# Altium PCB PCB_LMH0397_Breakout_2024-11-17.pcbdoc
Units mil, origin at the board's own origin, x right, y up, seen from the top; angles counter-clockwise.
Board outline 5208.03 x 3805 mil, 2 copper layers (Top Layer, Bottom Layer); 113 components, 59 nets, 262 pads, 77 vias.
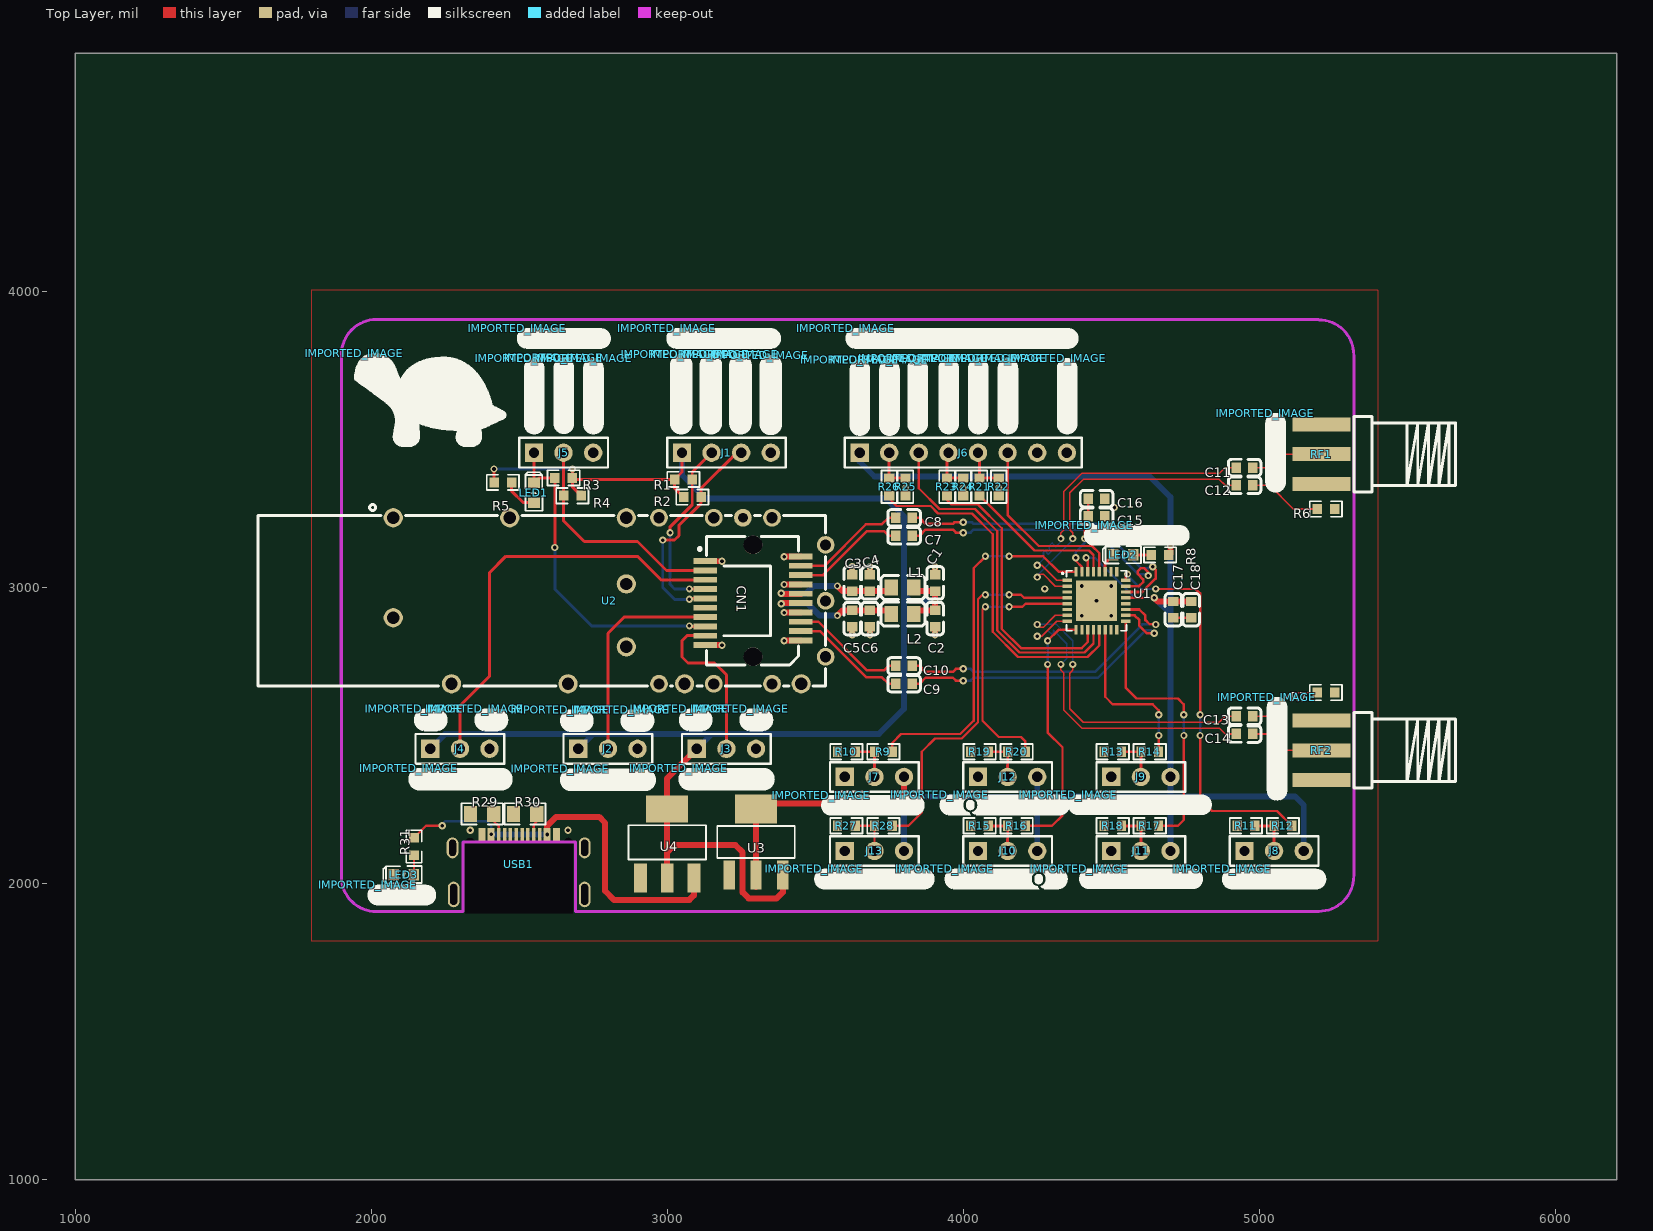
[diagram p0: Top Layer view]
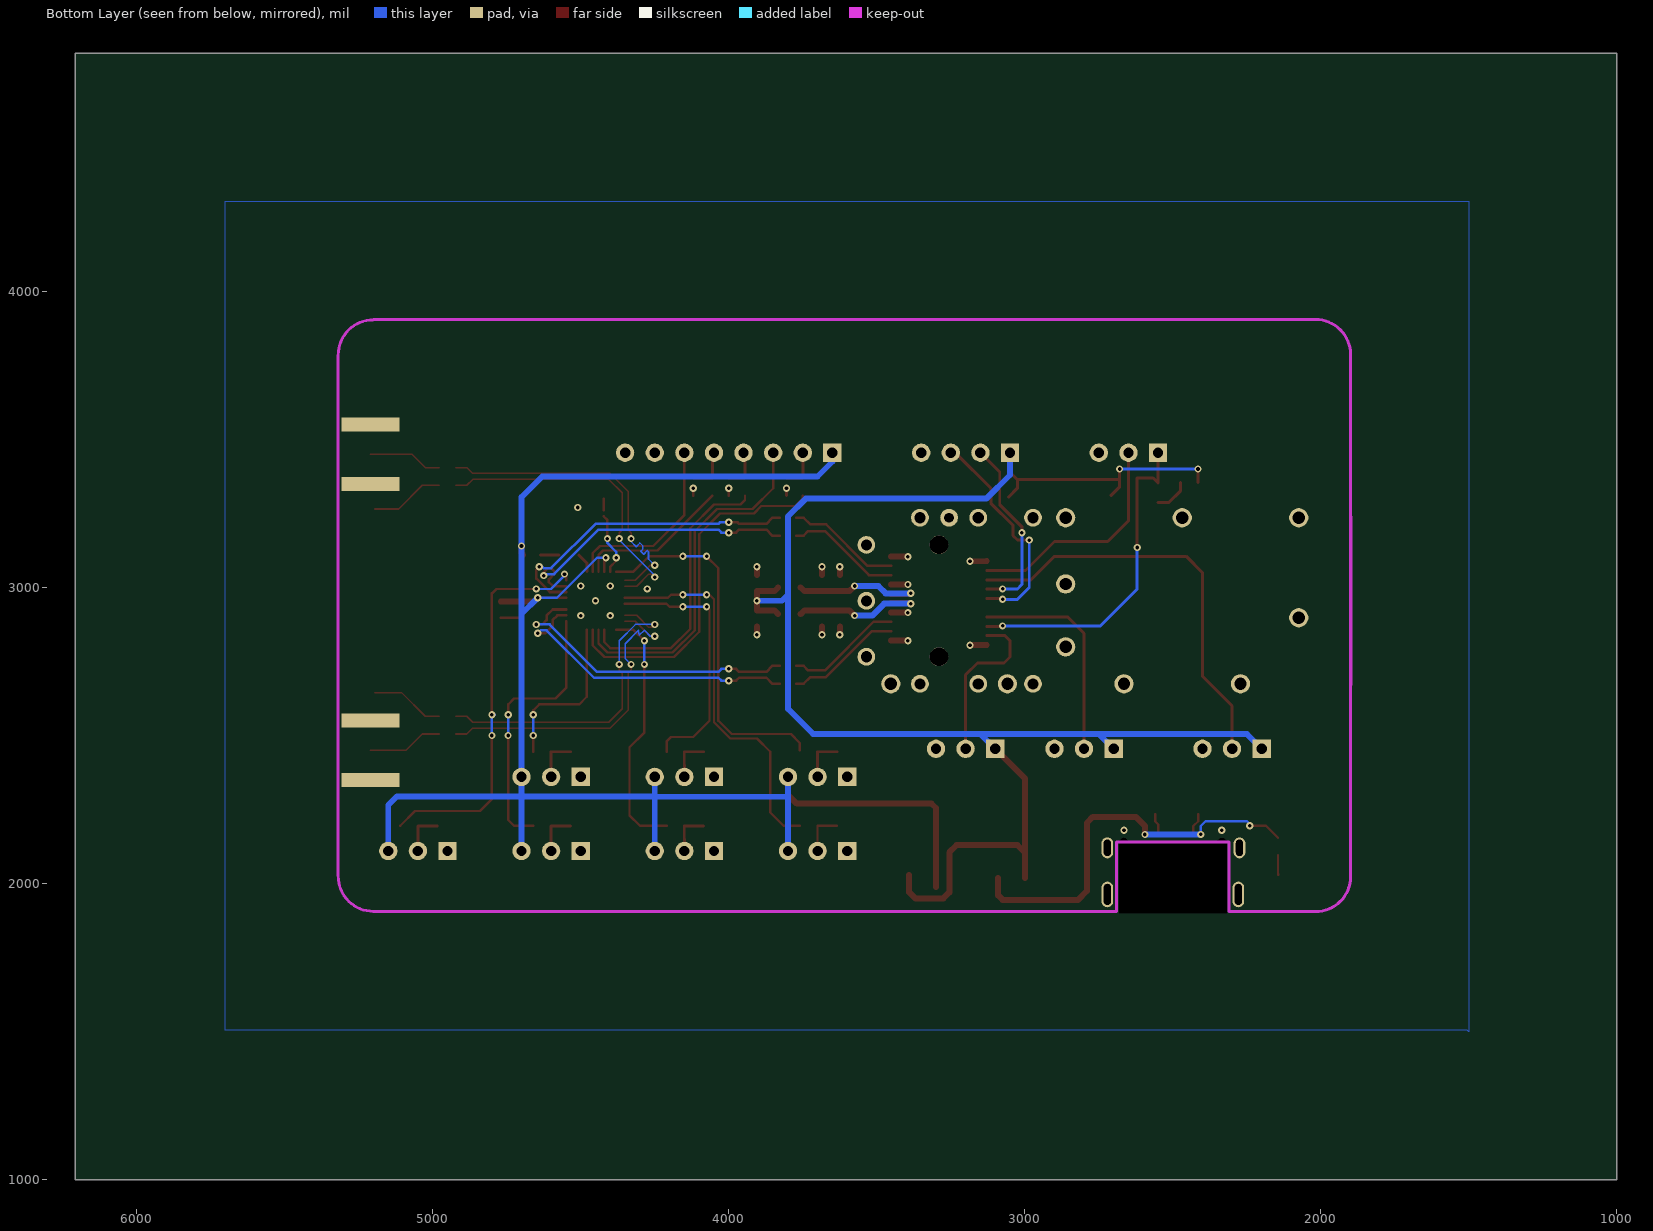
[diagram p1: Bottom Layer view, seen from below]

## Layer stack, top to bottom
Top Layer: signal copper (thickness not stored)
Dielectric: dielectric 12.6, FR-4, Dk 4.8
Bottom Layer: signal copper (thickness not stored)

## Board outline
6208.03,1000 1000,1000 1000,4805 6208.03,4805

## Components (designator, comment, footprint, x,y, rotation, side; value= is the part's Value field where it differs from the comment)
C1 "10u" C0603 3905,3015 r270 top
C2 "100n" C0603 3905,2895 r90 top
C3 "100n" C0603 3625,3015 r270 top
C4 "10u" C0603 3685,3015 r270 top
C5 "100n" C0603 3625,2895 r90 top
C6 "10u" C0603 3685,2895 r90 top
C7 "4.7uF" C0603 3800,3175 r180 top
C8 "4.7uF" C0603 3800,3235 r180 top
C9 "4.7uF" C0603 3800,2675 r180 top
C10 "4.7uF" C0603 3800,2735 r180 top
C11 "4.7uF" C0603 4950,3405 r180 top
C12 "4.7uF" C0603 4950,3345 r180 top
C13 "4.7uF" C0603 4950,2565 r180 top
C14 "4.7uF" C0603 4950,2505 r180 top
C15 "1u" C0603 4450,3240 r180 top
C16 "100n" C0603 4450,3300 r180 top
C17 "100n" C0603 4710,2925 r90 top
C18 "1u" C0603 4770,2925 r90 top
CN1 "HC-SFP-20P" CONN-SMD_20P-P0.80_HCTL_HC-SFP-20P 3290,2955 r270 top
IMPORTED_IMAGE "IMPORTED_IMAGE" IMPORTED_IMAGE 2638.63,2387.52 r0 top
IMPORTED_IMAGE "IMPORTED_IMAGE" IMPORTED_IMAGE 3038.73,2390 r0 top
IMPORTED_IMAGE "IMPORTED_IMAGE" IMPORTED_IMAGE 2126.43,2390 r0 top
IMPORTED_IMAGE "IMPORTED_IMAGE" IMPORTED_IMAGE 3040.25,2590 r0 top
IMPORTED_IMAGE "IMPORTED_IMAGE" IMPORTED_IMAGE 2638.87,2587.52 r0 top
IMPORTED_IMAGE "IMPORTED_IMAGE" IMPORTED_IMAGE 2145.25,2590 r0 top
IMPORTED_IMAGE "IMPORTED_IMAGE" IMPORTED_IMAGE 3244.43,2590 r0 top
IMPORTED_IMAGE "IMPORTED_IMAGE" IMPORTED_IMAGE 2349.43,2590 r0 top
IMPORTED_IMAGE "IMPORTED_IMAGE" IMPORTED_IMAGE 2843.05,2587.52 r0 top
IMPORTED_IMAGE "IMPORTED_IMAGE" IMPORTED_IMAGE 3312.48,3785.04 r0 top
IMPORTED_IMAGE "IMPORTED_IMAGE" IMPORTED_IMAGE 3010,3787.52 r0 top
IMPORTED_IMAGE "IMPORTED_IMAGE" IMPORTED_IMAGE 3110,3787.52 r0 top
IMPORTED_IMAGE "IMPORTED_IMAGE" IMPORTED_IMAGE 3210,3787.52 r0 top
IMPORTED_IMAGE "IMPORTED_IMAGE" IMPORTED_IMAGE 2616.84,3775.29 r0 top
IMPORTED_IMAGE "IMPORTED_IMAGE" IMPORTED_IMAGE 2516.84,3774.08 r0 top
IMPORTED_IMAGE "IMPORTED_IMAGE" IMPORTED_IMAGE 2716.84,3774.08 r0 top
IMPORTED_IMAGE "IMPORTED_IMAGE" IMPORTED_IMAGE 3520.6,2298.16 r0 top
IMPORTED_IMAGE "IMPORTED_IMAGE" IMPORTED_IMAGE 3937.72,2049.08 r0 top
IMPORTED_IMAGE "IMPORTED_IMAGE" IMPORTED_IMAGE 4392.12,2050 r0 top
IMPORTED_IMAGE "IMPORTED_IMAGE" IMPORTED_IMAGE 4874.49,2049.08 r0 top
IMPORTED_IMAGE "IMPORTED_IMAGE" IMPORTED_IMAGE 4355.06,2300 r0 top
IMPORTED_IMAGE "IMPORTED_IMAGE" IMPORTED_IMAGE 3920.68,2299.08 r0 top
IMPORTED_IMAGE "IMPORTED_IMAGE" IMPORTED_IMAGE 3616.84,3769.08 r0 top
IMPORTED_IMAGE "IMPORTED_IMAGE" IMPORTED_IMAGE 3716.84,3769.08 r0 top
IMPORTED_IMAGE "IMPORTED_IMAGE" IMPORTED_IMAGE 3811.84,3774.08 r0 top
IMPORTED_IMAGE "IMPORTED_IMAGE" IMPORTED_IMAGE 3916.84,3774.08 r0 top
IMPORTED_IMAGE "IMPORTED_IMAGE" IMPORTED_IMAGE 4016.84,3774.08 r0 top
IMPORTED_IMAGE "IMPORTED_IMAGE" IMPORTED_IMAGE 4316.84,3774.08 r0 top
IMPORTED_IMAGE "IMPORTED_IMAGE" IMPORTED_IMAGE 4116.84,3774.08 r0 top
IMPORTED_IMAGE "IMPORTED_IMAGE" IMPORTED_IMAGE 3497.29,2049.08 r0 top
IMPORTED_IMAGE "IMPORTED_IMAGE" IMPORTED_IMAGE 1988.46,1995 r0 top
IMPORTED_IMAGE "IMPORTED_IMAGE" IMPORTED_IMAGE 4407.99,3210 r0 top
IMPORTED_IMAGE "IMPORTED_IMAGE" IMPORTED_IMAGE 5020.92,3588.78 r0 top
IMPORTED_IMAGE "IMPORTED_IMAGE" IMPORTED_IMAGE 5025.92,2629.64 r0 top
IMPORTED_IMAGE "IMPORTED_IMAGE" IMPORTED_IMAGE 2997.76,3875 r0 top
IMPORTED_IMAGE "IMPORTED_IMAGE" IMPORTED_IMAGE 3602.76,3875 r0 top
IMPORTED_IMAGE "IMPORTED_IMAGE" IMPORTED_IMAGE 2492.76,3875 r0 top
IMPORTED_IMAGE "IMPORTED_IMAGE" IMPORTED_IMAGE 1942.7,3790.77 r0 top
J1 "SFP_I2C" HDR-M-2.54_1X4 3200,3455 r0 top
J2 "SFP_RATE0" HDR-M-2.54_1X3 2800,2455 r0 top
J3 "SFP_RATE1" HDR-M-2.54_1X3 3200,2455 r0 top
J4 "TX_DISABLE" HDR-M-2.54_1X3 2300,2455 r0 top
J5 "LOS_FAULT" HDR-M-2.54_1X3 2650,3455 r0 top
J6 "DRIVER_SPI" HDR-M-2.54_1X8 4050,3455 r0 top
J7 "DRIVER_EN" HDR-M-2.54_1X3 3700,2360 r0 top
J8 "SDI_VDO" HDR-M-2.54_1X3 5050,2110 r0 top
J9 "SDI_OUTSEL" HDR-M-2.54_1X3 4600,2360 r0 top
J10 "HOST_EQ0" HDR-M-2.54_1X3 4150,2110 r0 top
J11 "OUT_CTRL" HDR-M-2.54_1X3 4600,2110 r0 top
J12 "EQCD_SEL" HDR-M-2.54_1X3 4150,2360 r0 top
J13 "OUT0_SEL" HDR-M-2.54_1X3 3700,2110 r0 top
L1 "100Ω" L0805 3795,3000 r180 top
L2 "100Ω" L0805 3795,2910 r180 top
LED1 "LED_LOS" LED0603_RED 2550,3320 r90 top
LED2 "LOCKED" LED0603_GREEN 4540,3110 r180 top
LED3 "LED_POW" LED0603_RED 2110,2030 r180 top
R1 "4.7k" R0603 3055,3365 r0 top
R2 "4.7k" R0603 3085,3305 r0 top
R3 "4.7k" R0603 2650,3370 r180 top
R4 "4.7k" R0603 2680,3310 r180 top
R5 "1k" R0603 2445,3355 r0 top
R6 "75" R0603 5225,3265 r180 top
R7 "75" R0603 5225,2645 r180 top
R8 "200" R0603 4665,3110 r0 top
R9 "1k" R0603 3730,2445 r180 top
R10 "1k" R0603 3605,2445 r180 top
R11 "1k" R0603 4955,2195 r180 top
R12 "1k" R0603 5080,2195 r180 top
R13 "1k" R0603 4505,2445 r180 top
R14 "1k" R0603 4630,2445 r180 top
R15 "1k" R0603 4055,2195 r180 top
R16 "1k" R0603 4180,2195 r180 top
R17 "1k" R0603 4630,2195 r180 top
R18 "1k" R0603 4505,2195 r180 top
R19 "1k" R0603 4055,2445 r180 top
R20 "1k" R0603 4180,2445 r180 top
R21 "1k" R0603 4055,3340 r90 top
R22 "1k" R0603 4120,3340 r270 top
R23 "1k" R0603 3945,3340 r90 top
R24 "1k" R0603 4000,3340 r270 top
R25 "1k" R0603 3805,3340 r270 top
R26 "1k" R0603 3750,3340 r90 top
R27 "1k" R0603 3605,2195 r180 top
R28 "1k" R0603 3730,2195 r180 top
R29 "1k" R0805 2375,2235 r0 top
R30 "1k" R0805 2520,2235 r0 top
R31 "1k" R0603 2145,2125 r270 top
RF1 "SDI_IN" SMA-SMD_BWSMA-KE-P001 5210,3450 r180 top
RF2 "SDI_OUT" SMA-SMD_BWSMA-KE-P001 5210,2450 r180 top
U1 "LMH0397RTVR" QFN-32_L5.0-W5.0-P0.50-TL-EP3.5-1 4450,2955 r0 top
U2 "HC-SFP-01L" TH_HC-SFP-01L 2805,2955 r0 top
U3 "AMS1117-2.5(SOT-223)" SOT-223-4_L6.5-W3.5-P2.30-LS7.0-BR 3300,2140 r270 top
U4 "AMS1117-3.3" SOT-223-3_L6.5-W3.4-P2.30-LS7.0-BR 3000,2135 r270 top
USB1 "USB4510-03-1-A" USB4510-03-1-A 2500,1900 r180 top

## Footprints (in the part's own frame and the unit in brackets; to place one, negate y for a bottom-side part, rotate by r counter-clockwise, add the part's x,y. Pads: shape width x height; smd on the part's side, far side on the other; paste and mask are expansions set on the pad)
C0603 [mm]
  rect 0.8x0.9 smd paste+0 mask+0.051: 1(-0.7,0) 2(0.7,0)
  silkscreen extent -1.41,-0.71 1.39,0.72
CONN-SMD_20P-P0.80_HCTL_HC-SFP-20P [mm]
  rect 0.5x2 smd paste+0 mask+0.051: 1(-3.4,-4.1) 2(-2.6,-4.1) 3(-1.8,-4.1) 4(-1,-4.1) 5(-0.2,-4.1) 6(0.6,-4.1) 7(1.4,-4.1) 8(2.2,-4.1) 9(3,-4.1) 10(3.8,-4.1) 11(3.4,4.1) 12(2.6,4.1) 13(1.8,4.1) 14(1,4.1) 15(0.2,4.1) 16(-0.6,4.1) 17(-1.4,4.1) 18(-2.2,4.1) 19(-3,4.1) 20(-3.8,4.1)
  round 1.6 hole 1.6 unplated paste+0: ""(-4.8,0) ""(4.8,0)
  silkscreen extent -5.5,-4.7 5.5,3.9
HDR-M-2.54_1X3 [mil]
  rect 62x62 hole 35 paste+0 mask+2: 1(-100,0)
  round 62 hole 35 paste+0 mask+2: 2(0,0) 3(100,0)
  silkscreen extent -150,-50 150,50
HDR-M-2.54_1X4 [mil]
  rect 62x62 hole 35 paste+0 mask+2: 1(-150,0)
  round 62 hole 35 paste+0 mask+2: 2(-50,0) 3(50,0) 4(150,0)
  silkscreen extent -200,-50 200,50
HDR-M-2.54_1X8 [mil]
  rect 62x62 hole 35 paste+0 mask+2: 1(-400,0)
  round 62 hole 35 paste+0 mask+2: 2(-300,0) 3(-200,0) 4(-100,0) 5(0,0) 6(100,0) 7(200,0) 8(300,0)
  silkscreen extent -450,-50 350,50
IMPORTED_IMAGE [mil]
  silkscreen extent 0,-75 323,0
L0805 [mil]
  rect 44.59x54.21 smd paste-3937.01 mask+2: 1(-38.05,0) 2(38.04,0)
  silkscreen extent -77,-40 73,40
LED0603_GREEN [mm]
  rect 0.9x1 smd paste+0 mask+0.051: 1(-0.85,0) 2(0.85,0)
  silkscreen extent -1.54,-0.73 1.75,0.73
LED0603_RED [mm]
  rect 0.9x1 smd paste+0 mask+0.051: 1(-0.85,0) 2(0.85,0)
  silkscreen extent -1.54,-0.73 1.75,0.73
QFN-32_L5.0-W5.0-P0.50-TL-EP3.5-1 [mm]
  rect 0.8x0.28 smd paste-100 mask+0.051: 1(-2.5,1.75) 2(-2.5,1.25) 3(-2.5,0.75) 4(-2.5,0.25) 5(-2.5,-0.25) 6(-2.5,-0.75) 7(-2.5,-1.25) 8(-2.5,-1.75) 17(2.5,-1.75) 18(2.5,-1.25) 19(2.5,-0.75) 20(2.5,-0.25) 21(2.5,0.25) 22(2.5,0.75) 23(2.5,1.25) 24(2.5,1.75)
  rect 0.28x0.8 smd paste-100 mask+0.051: 9(-1.75,-2.5) 10(-1.25,-2.5) 11(-0.75,-2.5) 12(-0.25,-2.5) 13(0.25,-2.5) 14(0.75,-2.5) 15(1.25,-2.5) 16(1.75,-2.5) 25(1.75,2.5) 26(1.25,2.5) 27(0.75,2.5) 28(0.25,2.5) 29(-0.25,2.5) 30(-0.75,2.5) 31(-1.25,2.5) 32(-1.75,2.5)
  rect 3.5x3.5 smd paste-100 mask+0.051: 33(0,0)
  silkscreen extent -2.98,-2.58 2.58,2.58
R0603 [mil]
  rect 31.75x34.02 smd paste-3937.01 mask+2: 1(-29.66,0) 2(29.66,0)
  silkscreen extent -55,-26 55,26
R0805 [mil]
  rect 44.59x54.21 smd paste-3937.01 mask+2: 1(-39.37,0) 2(39.37,0)
  silkscreen extent -69,-36 69,36
SMA-SMD_BWSMA-KE-P001 [mm]
  rect 5x1.2 smd paste+0 mask+0.051: 1(0,2.55) 2(0,-2.55) 5(0,0)
  rect 5x1.2 smd far side paste+0 mask+0.051: 3(0,-2.55) 4(0,2.55)
  silkscreen extent -11.5,-3.25 -2.79,3.25
SOT-223-3_L6.5-W3.4-P2.30-LS7.0-BR [mm]
  rect 2.5x1.1 smd paste+0 mask+0.051: 1(2.97,-2.3) 2(2.97,0) 3(2.97,2.3)
  rect 2.34x3.6 smd paste+0 mask+0.051: 4(-2.97,0)
  silkscreen extent -1.57,-3.33 1.37,3.33
SOT-223-4_L6.5-W3.5-P2.30-LS7.0-BR [mm]
  rect 2.47x0.98 smd paste+0 mask+0.051: 1(2.835,-2.3) 2(2.835,0) 3(2.835,2.3)
  rect 2.47x3.6 smd paste+0 mask+0.051: 4(-2.835,0)
  silkscreen extent -1.37,-3.33 1.37,3.33
TH_HC-SFP-01L [mm]
  round 1.65 hole 1.05 paste+0 mask+0.05: 1(-18.55,7.125) 2(-8.55,7.125) 3(1.45,7.125) 11(16.45,-7.125) 14(6.45,-7.125) 16(-3.55,-7.125) 17(-13.55,-7.125) 18(-18.55,-1.455) 19(1.45,-3.955) 20(1.45,1.445)
  round 1.524 hole 0.95 paste+0 mask+0.05: 4(4.25,7.125) 5(8.95,7.125) 7(13.95,7.125) 8(18.55,4.795) 9(18.55,-0.005) 10(18.55,-4.805) 12(13.95,-7.125) 13(8.95,-7.125) 15(4.25,-7.125)
  round 1.524 hole 0.85 paste+0 mask+0.05: 6(11.45,7.125)
  Keep-Out Layer lines w0.254: -23.05,-7.239 -23.05,7.239
  silkscreen extent -30.15,-7.3 18.55,8.25
USB4510-03-1-A [mm]
  oval 1x2.2 hole 0.6 slot 1.8 at 90 deg unplated paste+0 mask+0.051: 1(-5.62,-1.6) 1(5.62,-1.6)
  oval 1x1.8 hole 0.6 slot 1.4 at 90 deg unplated paste+0 mask+0.051: 1(-5.62,-5.6) 1(5.715,-5.6)
  rect 0.6x1.1 smd paste+0: 2(-3.2,-6.75) 2(3.2,-6.75) 3(-2.4,-6.75) 3(2.4,-6.75)
  rect 0.3x1.1 smd paste+0: 4(-0.25,-6.75) 4(0.75,-6.75) 5(-0.75,-6.75) 5(0.25,-6.75) 6(-1.25,-6.75) 7(1.75,-6.75) 8(1.25,-6.75) 9(-1.75,-6.75)
  Multi-Layer board cut-out: 4.62,0 4.62,-6.048 4.58,-6.222 4.469,-6.361 4.309,-6.438 4.131,-6.438 3.971,-6.361 3.86,-6.222 3.82,-6.048 3.82,-6.048 3.82,-6.048 -3.82,-6.048 -3.82,-6.048 -3.86,-6.222 -3.971,-6.361 -4.131,-6.438 -4.309,-6.438 -4.469,-6.361 -4.58,-6.222 -4.62,-6.048 -4.62,-6.048 -4.62,0

## Via types
v1: diameter 24.41, hole 12.2, Top Layer to Bottom Layer, tented both sides, 77 vias

## Nets (pads, with @x,y where several pads share a name; then routed paths per layer and width w, separated by ;. In a path a pad name is that pad's centre, name@x,y a point inside that pad or via, vN(x,y) a via of type N, cw(c..) or ccw(c..) an arc to the next point about the centre after c; other vN are vias at no path point)
+1.8V: C15.2 C16.2 U1.31 | length 252.8
  Top Layer w7.87: v1(4380,3100) 4380,3090 4400.8,3069.2 U1.31 ; v1(4410,3165) 4410,3227.56 C15.2 ; 4422.44,3260 C16.2
  Bottom Layer w7.87: v1(4380,3100) 4380,3120 4410,3150 v1(4410,3165)
+2.5V: C17.2 C18.2 J6.1 J7.3 J8.3 J9.3 J10.3 J11.3 J12.3 J13.3 R8.2 U1.21 U1.30 U3.2 U3.4 | length 5991.5
  Top Layer w7.87: v1(4415,3100) 4420.47,3094.53 U1.30 ; U1.21 4548.6,2965 v1(4645,2965)
  Top Layer w19.68: v1(4645,2965) 4657.4,2952.6 C17.2 ; C17.2 C18.2
  Top Layer w20.16: U3.2@3300,1988.39 U3.4 3300,2255 3315,2270 3770,2270 3800,2300 J7.3 ; R8.2 4700,3115.34 v1(4700,3140)
  Bottom Layer w7.87: v1(4415,3100) 4445,3100 4580,2965 v1(4645,2965)
  Bottom Layer w19.68: J6.1 3650,3425 3700,3375 4630,3375 4700,3305 4700,2910 ; J13.3 J7.3 3800,2293 4250,2293 ; J10.3 J12.3 4250,2294 4700,2294 5121,2294 5150,2265 J8.3 ; v1(4645,2965) 4700,2910 ; J11.3 J9.3 4700,2910
+3.3V: C1.2 C2.2 J1.1 J2.1 J3.1 J4.1 L1.1 L2.1 R1.1 R2.1 R3.1 R4.1 R5.1 U3.3 U4.2 U4.4 | length 5782.1
  Top Layer w10: v1(2415,3400) 2415,3355.34 R5.1 ; v1(2680,3400) 2680,3370.34 R3.1 ; R4.1 2679.66,3340 R3.1 ; J1.1 3050,3389.66 R1.1 ; R2.1 3025.34,3335 R1.1 ; R3.1 2684.66,3365 R1.1
  Top Layer w20.16: J3.1 3000,2355 U4.4 U4.2 3000,2105 3025,2130 3230,2130 3255,2105 3255,1970 3275,1950 3370,1950 3390.6,1970.5 U3.3 ; L2.1 3845.6,2922.56 C2.2 C1.2 3845.6,2987.44 L1.1
  Bottom Layer w10: v1(2415,3400) v1(2680,3400)
  Bottom Layer w20.16: J4.1 2250,2505 2750,2505 ; J2.1 2750,2505 ; J1.1 3050,3380 3130,3300 3740,3300 3800,3240 3800,2975 ; J3.1 3150,2505 ; v1(3905,2955) 3820,2955 3800,2975 ; 2750,2505 3150,2505 ; 3150,2505 3715,2505 3800,2590 3800,2975
+5V: R31.1 U4.3 USB1.3 | length 1362.5
  Top Layer w7.87: R31.1 2185.34,2195 v1(2240,2195)
  Top Layer w20.16: v1(2594.5,2165.7) 2594.5,2194.5 2625,2225 2770,2225 2790,2205 2790,1975 2820,1945 3075,1945 3090,1960 U4.3
  Bottom Layer w7.87: v1(2240,2195) 2240,2200 2250,2210 2390,2210 2405.51,2194.49 v1(2405.51,2165.75)
  Bottom Layer w20.16: v1(2405.51,2165.75) v1@2594.49,2165.75
DRIVER_EN: R9.1 U1.32 | length 1230.1
  Top Layer w7.87: R9.1@3760,2450 3759.9,2474.8 3790.1,2505 3990,2505 4035,2550 4035,3065 v1(4075,3105) ; v1(4155,3105) 4270,3105 4321.6,3053.4 U1.32
  Bottom Layer w7.87: v1(4075,3105) v1(4155,3105)
DRIVER_EQCD_SEL: R20.1 U1.5 | length 878.9
  Top Layer w7.87: v1(4075,2935) 4065,2925 4065,2550 4120,2495 4195,2495 4210,2480 R20.1 ; v1(4155,2935) 4200,2935 4210.16,2945.16 U1.5
  Bottom Layer w7.87: v1(4075,2935) v1(4155,2935)
DRIVER_HOST_EQ0: R16.1 U1.9 | length 861.8
  Top Layer w7.87: R16.1 4300,2195 4335,2230 4335,2460 4285,2510 v1(4285,2740) ; v1(4285,2820) 4321.58,2856.58 U1.9
  Bottom Layer w7.87: v1(4285,2740) v1(4285,2820)
DRIVER_MISO: J6.6 U1.28 | length 635.4
  Top Layer w7.87: J6.6 4150,3245 4255,3140 4435,3140 4459.8,3115.2 U1.28
DRIVER_MODE: J6.3 U1.12 | length 1195.2
  Top Layer w7.87: J6.3 3850,3335 3920,3265 4040,3265 4115,3190 4115,2855 4190,2780 4410,2780 4440.2,2810.2 U1.12
DRIVER_MOSI: R26.1 U1.13 | length 1203.3
  Top Layer w7.87: R26.1 3750,3300 3775,3275 3890,3275 3915,3250 4030,3250 4100,3180 4100,2850 4185,2765 4420,2765 4459.8,2804.8 U1.13
DRIVER_MOSI_25V: J6.2 R25.1 R26.2 | length 140.3
  Top Layer w10: J6.2 R26.2 R25.1
DRIVER_OUT0_SEL: R28.1 U1.4 | length 1282.4
  Top Layer w7.87: R28.1 3815,2195 3860,2240 3860,2445 3905,2490 3995,2490 4050,2545 4050,2960 4065,2975 v1(4075,2975) ; v1(4155,2975) 4195,2975 4205.16,2964.84 U1.4
  Bottom Layer w7.87: v1(4075,2975) v1(4155,2975)
DRIVER_OUT_CTRL: R17.1 U1.17 | length 928.5
  Top Layer w7.87: U1.17 4548.4,2661.6 4585,2625 4725,2625 4745,2605 v1(4745,2570) ; R17.1 4725,2195 4745.34,2215.34 v1(4745.34,2500)
  Bottom Layer w7.87: v1(4745,2570) 4745.34,2569.66 v1(4745.34,2500)
DRIVER_SCK: R21.1 U1.29 | length 524.6
  Top Layer w7.87: R21.1 4240.3,3125 4425,3125 4440.2,3109.8 U1.29
DRIVER_SCK_25V: J6.5 R21.2 R22.1 | length 152.4
  Top Layer w10: J6.5 4055,3450 R21.2 R22.1
DRIVER_SDI_OUTSEL: R14.1 U1.14 | length 565.6
  Top Layer w7.87: U1.14 4479.5,2630.5 4505,2605 4640,2605 4660,2585 v1(4660,2570) ; R14.1 4660,2445.34 v1(4660,2500)
  Bottom Layer w7.87: v1(4660,2500) v1(4660,2570)
DRIVER_SDI_VDO: R12.1 U1.24 | length 1344.8
  Top Layer w7.87: U1.24 4548.43,3038.43 v1(4555,3045) ; v1(4650,2995) 4785,2995 4800,2980 v1(4800,2570) ; v1(4800,2500) 4800,2285 4840,2245 5059.66,2245 R12.1
  Bottom Layer w7.87: v1(4555,3045) 4555,3040 4600,2995 v1(4650,2995) ; v1@4790,2570 4800,2560 v1(4800,2500)
DRIVER_SS: R23.1 U1.11 | length 946.7
  Top Layer w7.87: R23.1 3945,3295 3960,3280 4050,3280 4130,3200 4130,2860 4195,2795 4400,2795 4420.5,2815.5 U1.11
DRIVER_SS_25V: J6.4 R23.2 R24.1 | length 142.4
  Top Layer w10: J6.4 3945,3450 R23.2 R24.1
GND: C1.1 C2.1 C3.1 C4.1 C5.1 C6.1 C15.1 C16.1 C17.1 C18.1 CN1.1 CN1.10 CN1.11 CN1.14 CN1.17 CN1.20 J1.4 J2.3 J3.3 J4.3 J5.3 J6.8 J7.1 J8.1 J9.1 J10.1 J11.1 J12.1 J13.1 LED3.2 R6.1 R7.1 R10.2 R11.2 R13.2 R15.2 R18.2 R19.2 R22.2 R24.2 R25.2 R27.2 R29.1 R30.1 RF1.1 RF1.2 RF1.3 RF1.4 RF2.1 RF2.2 RF2.3 RF2.4 U1.3 U1.6 U1.20 U1.33 U2.1 U2.2 U2.3 U2.4 U2.5 U2.6 U2.7 U2.8 U2.9 U2.10 U2.11 U2.12 U2.13 U2.14 U2.15 U2.16 U2.17 U2.18 U2.19 U2.20 U3.1 U4.1 USB1.1 USB1.2 | length 638.2
  Top Layer w7.87: C17.1 C18.1
  Top Layer w10: R25.2 v1(3805,3335) ; R24.2 v1(4000,3335) ; R22.2 v1(4120,3335)
  Top Layer w20.16: CN1.10 3184.61,2805.39 v1(3185,2805) ; CN1.1 v1(3185,3088.47) ; v1(3395,2820) 3396.14,2821.14 CN1.11 ; v1(3395,2915) CN1.14 ; v1(3395,3010) CN1.17 ; v1(3395,3103.47) 3396.14,3104.61 CN1.20 ; v1(3625,2840) C5.1 ; C3.1 v1(3625,3070) ; v1(3685,2840) C6.1 ; C4.1 v1(3685,3070) ; v1(3905,2840) C2.1 ; C1.1 v1(3905,3070)
  other v1: 2335,2180 2665,2180 4400,2905 4500,2905 4450,2955 4275,2995 4400,3005 4500,3005 4510,3270
J8_2: J8.2 R11.1 R12.2 | length 150.7
  Top Layer w10: R11.1 R12.2 J8.2@5050.34,2110
J9_2: J9.2 R13.1 R14.2 | length 150.7
  Top Layer w10: R13.1 R14.2 J9.2
J10_2: J10.2 R15.1 R16.2 | length 150.7
  Top Layer w10: R15.1 R16.2 J10.2
J11_2: J11.2 R17.2 R18.1 | length 150.7
  Top Layer w10: R18.1 R17.2 J11.2
J13_2: J13.2 R27.1 R28.2 | length 150.7
  Top Layer w7.87: R27.1 R28.2 ; J13.2 R28.2
LED1_1: LED1.1 R5.2 | length 121.1
  Top Layer w10: R5.2 2474.7,3325.3 2513.5,3286.5 LED1.1
LED2_1: LED2.1 R8.1 | length 61.9
  Top Layer w10: LED2.1 R8.1
R9_2: J7.2 R9.2 R10.1 | length 150.7
  Top Layer w10: R10.1 R9.2 J7.2
R20_2: J12.2 R19.1 R20.2 | length 150.7
  Top Layer w10: R19.1 R20.2 J12.2
R29_2: R29.2 USB1.7 | length 76.2
  Top Layer w7.87: R29.2 2414.4,2210.6 2431.1,2193.9 USB1.7@2431.1,2165.7
R30_2: R30.2 USB1.6 | length 73.5
  Top Layer w7.87: USB1.6@2549.2,2165.7 2549.2,2199.2 2559.4,2209.4 R30.2
R31_2: LED3.1 R31.2 | length 66
  Top Layer w7.87: LED3.1 2145,2031.53 R31.2
SDI_ID+: C11.2 U1.1 | length 1081.8
  Top Layer w5.31: v1(4250,3075) 4265,3075 4316.1,3023.9 U1.1 ; v1(4330,3165) 4330,3185 4340,3195 4340,3325 4400,3385 4865,3385 4885,3405 C11.2
  Bottom Layer w5.31: v1(4250,3075) 4271,3096 4271,3121 4275,3125 4287.5,3112.5 4297.5,3122.5 4290,3130 4290,3140 4300,3150 4312.5,3137.5 4330,3155 v1(4330,3165)
SDI_ID-: C12.2 U1.2 | length 1050.8
  Top Layer w5.31: v1(4250,3035) 4260,3045 4270,3045 4310.8,3004.2 U1.2 ; v1(4370,3165) 4370,3185 4360,3195 4360,3320 4405,3365 4865,3365 4885,3345 C12.2
  Bottom Layer w5.31: v1(4250,3035) 4250,3040 4370,3160 v1(4370,3165)
SDI_LID+: C11.1 RF1.5 | length 251.1
  Top Layer w5.31: C11.1 5025,3405 5070.01,3450.01 RF1.5
SDI_LID-: C12.1 R6.2 | length 250.8
  Top Layer w5.31: C12.1 5035,3345 5115,3265 R6.2
SDI_LO+: C14.1 RF2.5 | length 255.2
  Top Layer w5.31: C14.1 5035,2505 5089.99,2450.01 RF2.5
SDI_LO-: C13.1 R7.2 | length 250.9
  Top Layer w5.31: C13.1 5025,2565 5105,2645 R7.2
SDI_OD+: C14.2 U1.8 | length 1123.9
  Top Layer w5.31: v1(4250,2835) 4265,2835 4316.1,2886.1 U1.8 ; v1(4330,2740) 4330,2720 4340,2710 4340,2585 4400,2525 4865,2525 4885,2505 C14.2
  Bottom Layer w5.31: v1(4250,2835) 4265,2835 4285,2855 4303,2838.38 4305,2855 4350,2810 4350,2760 v1(4330,2740)
SDI_OD-: C13.2 U1.7 | length 1088.9
  Top Layer w5.31: v1(4250,2875) 4260,2865 4270,2865 4310.8,2905.8 U1.7 ; v1(4370,2740) 4370,2720 4360,2710 4360,2590 4405,2545 4865,2545 4885,2565 C13.2
  Bottom Layer w5.31: v1(4250,2875) 4315,2875 4370,2820 v1(4370,2740)
SFP_CRD+: C10.1 U1.19 | length 1036.5
  Top Layer w8.68: C10.1 3853.3,2735 3873.3,2715 3965,2715 3975,2725 v1(4000,2725) ; U1.19 4594.52,2925.47 4615,2905 4615,2890 4630,2875 v1(4650,2875)
  Bottom Layer w8.68: v1(4000,2725) 4025,2725 4035,2715 4445,2715 4605,2875 v1(4650,2875)
SFP_CRD-: C9.1 U1.18 | length 1037.9
  Top Layer w8.68: C9.1 3853.3,2675 3873.3,2695 3965,2695 3975,2685 v1(4000,2685) ; U1.18 4579.2,2905.8 4595,2890 4595,2870 4620,2845 v1(4645,2845)
  Bottom Layer w8.68: v1(4000,2685) 4025,2685 4035,2695 4455,2695 4615,2855 4635,2855 v1(4645,2845)
SFP_CTD+: C7.1 U1.23 | length 1045.8
  Top Layer w8.68: C7.1 3853.3,3175 3873.3,3195 3965,3195 3975,3185 v1(4000,3185) ; U1.23 4594.2,3004.2 4607.5,3017.5 4607.5,3027.5 4590,3045 4590,3055 4600,3065 4610,3065 4625,3050 v1(4625,3040)
  Bottom Layer w8.68: v1(4000,3185) 4025,3185 4035,3195 4440,3195 4590,3045 4625,3045 v1(4625,3040)
SFP_CTD-: C8.1 U1.22 | length 1053.6
  Top Layer w8.68: C8.1 3853.3,3235 3873.3,3215 3965,3215 3970,3220 v1(4000,3220) ; U1.22 4604.5,2984.5 4650,3030 4650,3060 v1(4640,3070)
  Bottom Layer w8.68: v1(4000,3220) 4030,3220 4035,3215 4450,3215 4600,3065 4625,3065 4630,3070 v1(4640,3070)
SFP_MOD_DEF0: CN1.6
SFP_RATE_SELECT0: CN1.7 J2.2 | length 741.3
  Top Layer w10: J2.2 2800,2845 2854.9,2899.9 CN1.7
SFP_RATE_SELECT1: CN1.9 J3.2 | length 565.5
  Top Layer w10: CN1.9 3066.9,2836.9 3050,2820 3050,2765 3070,2745 3160,2745 3200,2705 J3.2
SFP_RD+: C10.2 CN1.13 | length 395.2
  Top Layer w8.68: CN1.13 3510.9,2884.1 3675,2720 3731.7,2720 3746.7,2735 C10.2
SFP_RD-: C9.2 CN1.12 | length 394.6
  Top Layer w8.68: CN1.12 3516.4,2852.6 3672,2697 3724.7,2697 3746.7,2675 C9.2
SFP_RX_LOS: CN1.8 J5.1 LED1.2 R3.2 | length 1114.6
  Top Layer w10: J5.1 LED1.2 2566.54,3370 R3.2 v1(2620.34,3135) ; v1(3075,2870) 3076.61,2868.39 CN1.8
  Bottom Layer w10: v1(2620.34,3135) 2620.34,2994.66 2745,2870 v1(3075,2870)
SFP_SCL: CN1.5 J1.3 R2.2 | length 758.4
  Top Layer w10: v1(2985,3160) 3025,3160 3040,3175 3040,3210 3114.7,3284.7 R2.2 ; v1(3075,2960) 3077.88,2962.88 CN1.5 ; R2.2 3114.66,3334.66 3235,3455 J1.3
  Bottom Layer w10: v1(2985,3160) 2985,3000 3025,2960 v1(3075,2960)
SFP_SDA: CN1.4 J1.2 R1.2 | length 627.8
  Top Layer w10: v1(3010,3185) 3010,3205 3084.7,3279.7 R1.2 ; v1(3075,2995) CN1.4 ; R1.2 3084.66,3389.66 J1.2
  Bottom Layer w10: v1(3010,3185) 3010,3010 3025,2995 v1(3075,2995)
SFP_TD+: C7.2 CN1.18 | length 388.7
  Top Layer w8.68: CN1.18 3526.6,3041.6 3675,3190 3731.7,3190 3746.7,3175 C7.2
SFP_TD-: C8.2 CN1.19 | length 388.1
  Top Layer w8.68: CN1.19 3530.9,3073.1 3670.7,3213 3724.7,3213 3746.7,3235 C8.2
SFP_TX_DISABLE: CN1.3 J4.2 | length 1420.6
  Top Layer w10: J4.2 2300,2600 2400,2700 2400,3050 2455,3105 2900,3105 2979.1,3025.9 CN1.3
SFP_TX_FAULT: CN1.2 J5.2 R4.2 | length 777.9
  Top Layer w10: J5.2 R4.2 ; R4.2 2650.34,3224.66 2720,3155 2900,3155 2997.64,3057.36 CN1.2
SFP_VCCR: C5.2 C6.2 CN1.15 L2.2 | length 468.3
  Top Layer w20.16: v1(3385,2945) 3387.13,2947.13 CN1.15 ; v1(3575,2905) 3592.56,2922.56 C5.2 C6.2 3744.4,2922.56 L2.2
  Bottom Layer w20.16: v1(3385,2945) 3475,2945 3515,2905 v1(3575,2905)
SFP_VCCT: C3.2 C4.2 CN1.16 L1.2 | length 461.8
  Top Layer w20.16: v1(3385,2980) 3386.38,2978.62 CN1.16 ; v1(3575,3005) 3592.56,2987.44 C3.2 C4.2 3744.4,2987.44 L1.2
  Bottom Layer w20.16: v1(3385,2980) 3470,2980 3495,3005 v1(3575,3005)
U1_27: LED2.2 U1.27 | length 67.8
  Top Layer w10: U1.27 4479.53,3082.99 LED2.2
pads on no net: CN1. J6.7 U1.10 U1.15 U1.16 U1.25 U1.26 USB1.4 USB1.5 USB1.8 USB1.9
copper on no net: | length 0.1

## Polygon pours and split planes (outlines as drawn)
GND on Bottom Layer (solid): 1500,1500 1505,1505 5700,1505 5700,4305 1500,4305 1500,4300
GND on Mid-Layer 2 (solid): 1600,4205 5600,4205 5600,1605 1600,1605
GND on Mid-Layer 1 (solid): 1700,1705 5500,1705 5505,1710 5505,4105 1700,4105 1700,4005
GND on Top Layer (solid): 1800,4005 5400,4005 5400,1805 1800,1805 1800,1835

## Keep-outs
Keep-Out Layer:
  lines w10: 1899.81,2023.11 ccw(c2017.92,2023.11) 2017.92,1905 ; 1900,3786.89 cw(c2018.11,3786.89) 2018.11,3905 ; 5200.94,1905.95 ccw(c5200.94,2024.06) 5319.05,2024.06 ; 5200.94,3904.06 cw(c5200.94,3785.95) 5319.05,3785.95